# EAGLE board fan-faker-2sides (EAGLE 6.6.0)
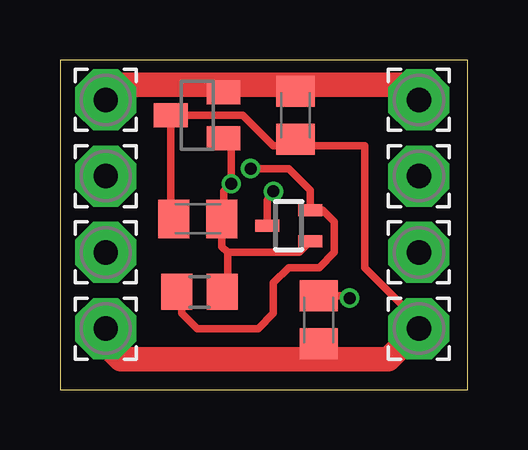
[diagram p0: board, top side]
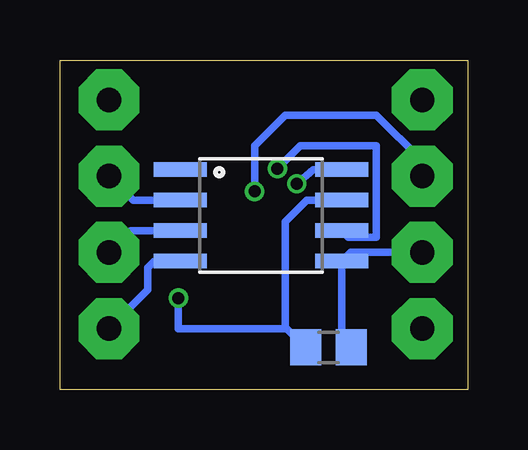
[diagram p1: board, bottom side, seen from below]

Size 17 x 13.73 mm. Coordinates in mm from the lower left corner, seen from the top.
Outline: 0,0 17,0 17,13.73 0,13.73 0,0
Copper layers (1*16): Top 0.035mm / dielectric 1.5mm / Bottom 0.035mm
Design rules "SeeedStudio_2layer_DRU_no_angle_20140221": minimum track width 6mil, minimum drill 12mil, track to track 6mil, track to pad 6mil, pad to pad 6mil, via to via 6mil, smd to smd 0mil, copper to edge 10mil, drill to drill 10mil, minimum pad ring 10mil, minimum via ring 6mil, stop-mask expansion 2mil, vias tented up to drill 100mil, thermal gap 10mil

## Footprints (pad centres in the part's own frame; a part is rotated, then mirrored left to right if it is on the bottom)
2,54/1,0 = drill 1.016 pad 2.54 octagon: 1 0,0
C0805K = smd 1.3 x 1.6: 1 -1,0; 2 1,0
SOT323 = smd 0.5 x 1: 1 0,0.9; 2 -0.65,-0.9; 3 0.65,-0.9
R0805 = smd 1.3 x 1.5: 1 -0.95,0; 2 0.95,0
SO08-EIAJ = smd 0.61 x 2.21: 1 -1.905,-3.378; 2 -0.635,-3.378; 3 0.635,-3.378; 4 1.905,-3.378; 5 1.905,3.353; 6 0.635,3.353; 7 -0.635,3.353; 8 -1.905,3.353
SOT23 = smd 1 x 1.4: 1 -0.95,-1.1; 2 0.95,-1.1; 3 0,1.1

## Placement (x,y rotation side)
BLACK_1  BLK  [2,54/1,0]  14.96,2.54 0 top
BLACK_2  BLK  [2,54/1,0]  1.91,2.54 0 top
BLUE_1  BLU  [2,54/1,0]  14.96,5.71 0 top
BLUE_2  BLU  [2,54/1,0]  1.91,5.71 0 top
C1  100nF  [C0805K]  9.81,11.43 270 top
C2  1uF  [C0805K]  5.75,7.11 180 top
C3  1uF  [C0805K]  10.78,2.9 270 top
Q1  BSS138BKW  [SOT323]  9.53,6.83 90 top
R1  10k  [R0805]  5.81,4.07 180 top
R2  8.2k  [R0805]  5.81,1.76 180 bottom
RED_1  RED  [2,54/1,0]  14.96,12.06 0 top
RED_2  RED  [2,54/1,0]  1.91,12.06 0 top
U1  Tiny85-20-SMT  [SO08-EIAJ]  8.61,7.25 270 bottom
U$2  LM3480  [SOT23]  5.71,11.43 90 top
YELLOW_1  YLW  [2,54/1,0]  14.96,8.89 0 top
YELLOW_2  YLW  [2,54/1,0]  1.91,8.89 0 top

## Library data of the parts
BLACK_1 BLACK_2 BLUE_1 BLUE_2 RED_1 RED_2 YELLOW_1 YELLOW_2 = wirepad
C1-C3 R1 R2 = rcl
Q1 U$2 = misc-user
U1 = SparkFun-DigitalIC; PROD_ID: IC-09092

## Nets
GND: BLACK_1.1 BLACK_2.1 C1.2 C2.2 C3.2 U1.4 U$2.3
PWM_C: BLUE_2.1 R2.1 U1.5
PWM_F: BLUE_1.1 U1.3
PWM_M: C3.1 R2.2 U1.7
SENSE_C: Q1.1 YELLOW_2.1
SENSE_F: U1.2 YELLOW_1.1
SENSE_M: Q1.3 R1.2 U1.6
V5: C2.1 Q1.2 R1.1 U1.8 U$2.1
VIN: C1.1 RED_1.1 RED_2.1 U$2.2

## Tracks (layer width: path | path; a pad name or v marks a point on that pad's centre or on a via)
GND
  Top 0.305: C3.2 10.79,1.91 11.43,1.27 | C2.2 4.62,7.24 U$2.3 7.62,11.43 8.89,10.16 9.54,10.16 C1.2 10.08,10.16 12.7,10.16 12.7,5.08 14.96,2.83 BLACK_1.1
  Top 1.016: BLACK_2.1 1.91,1.91 2.54,1.27 11.43,1.27 13.69,1.27 BLACK_1.1
  Bottom 0.305: U1.4 13.06,5.35 13.34,5.08 13.34,4.16 BLACK_1.1
PWM_C
  Bottom 0.305: BLUE_2.1 4.89,5.71 U1.5 5.25,2.15 R2.1
PWM_F
  Bottom 0.305: U1.3 14.05,6.62 BLUE_1.1
PWM_M  (via drill 0.5)
  Top 0.305: C3.1 11.97,3.9 v12.06,3.81
  Bottom 0.305: U1.7 6.71,7.89 7.62,6.99 7.62,2.54 | 7.62,2.54 7.54,2.54 R2.2 | v12.06,3.81 12.06,2.54 7.62,2.54
SENSE_C  (via drill 0.5)
  Top 0.305: Q1.1 8.62,7.88 v8.89,8.26
  Bottom 0.305: v8.89,8.26 8.89,10.16 7.62,11.43 3.81,11.43 1.91,9.53 YELLOW_2.1
SENSE_F
  Bottom 0.305: U1.2 13.96,7.89 YELLOW_1.1
SENSE_M  (via drill 0.5)
  Top 0.305: 4.83,4.07 R1.2 5.08,3.85 5.08,3.17 5.71,2.54 8.26,2.54 8.89,3.17 8.89,4.45 9.53,5.08 10.79,5.08 11.43,5.71 11.43,6.99 10.94,7.47 Q1.3 10.43,8.31 9.53,9.21 v7.94,9.21
  Bottom 0.305: v7.94,9.21 6.99,10.16 3.81,10.16 3.81,6.35 4.98,6.35 U1.6
V5  (via drill 0.5)
  Top 0.305: U$2.1 6.99,10.48 7.13,10.33 v7.13,8.57 6.82,8.26 6.82,7.18 C2.1 6.75,5.96 6.99,5.71 | 6.99,5.71 6.99,4.29 R1.1 | 6.99,5.71 9.96,5.71 Q1.2
  Bottom 0.305: U1.8 6.45,9.16 v7.13,8.57
VIN
  Top 0.305: U$2.2 6.67,12.38 6.35,12.7 9.54,12.7 C1.1
  Top 1.016: RED_2.1 2.54,12.7 6.35,12.7 6.5,12.7 | 6.5,12.7 U$2.2 | RED_1.1 14.96,12.35 14.61,12.7 6.5,12.7